# Altium PCB Dimmer.PcbDoc
Units mm, origin at the board's own origin, x right, y up, seen from the top; angles counter-clockwise.
Board outline 48 x 30 mm, 2 copper layers (Top Layer, Bottom Layer), stack 1.671 mm thick; 20 components, 12 nets, 70 pads, 42 vias.
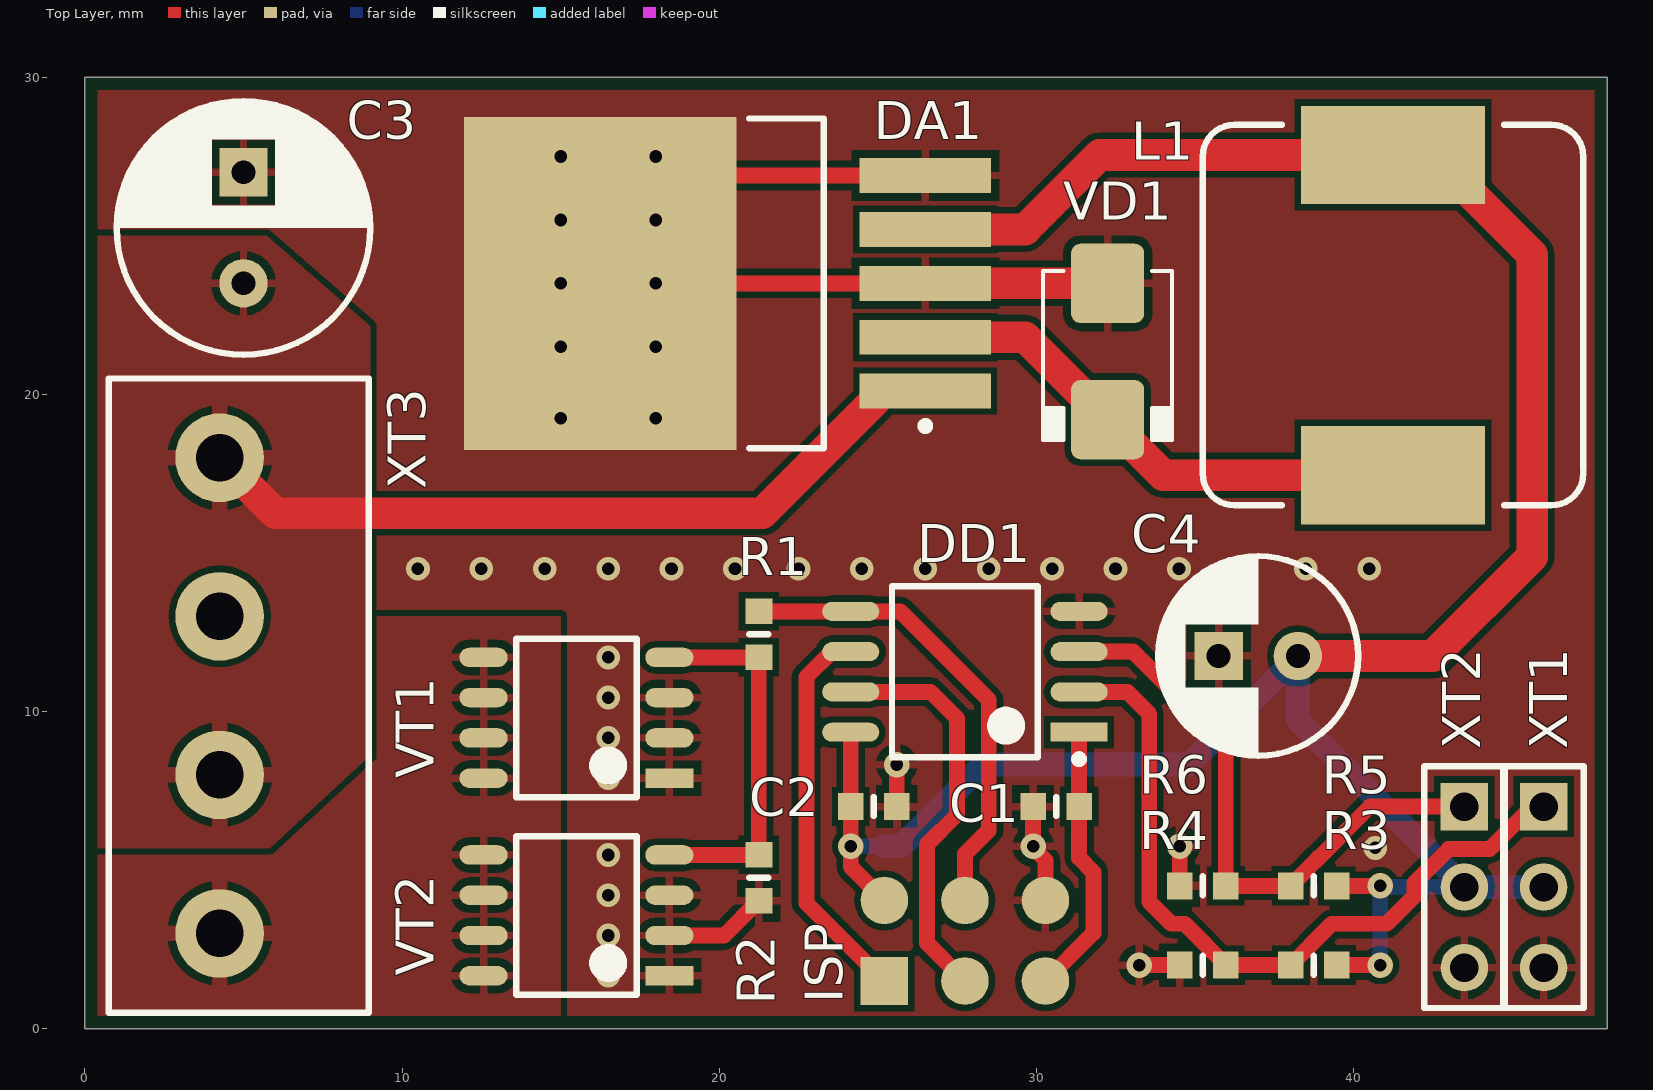
[diagram p0: Top Layer view]
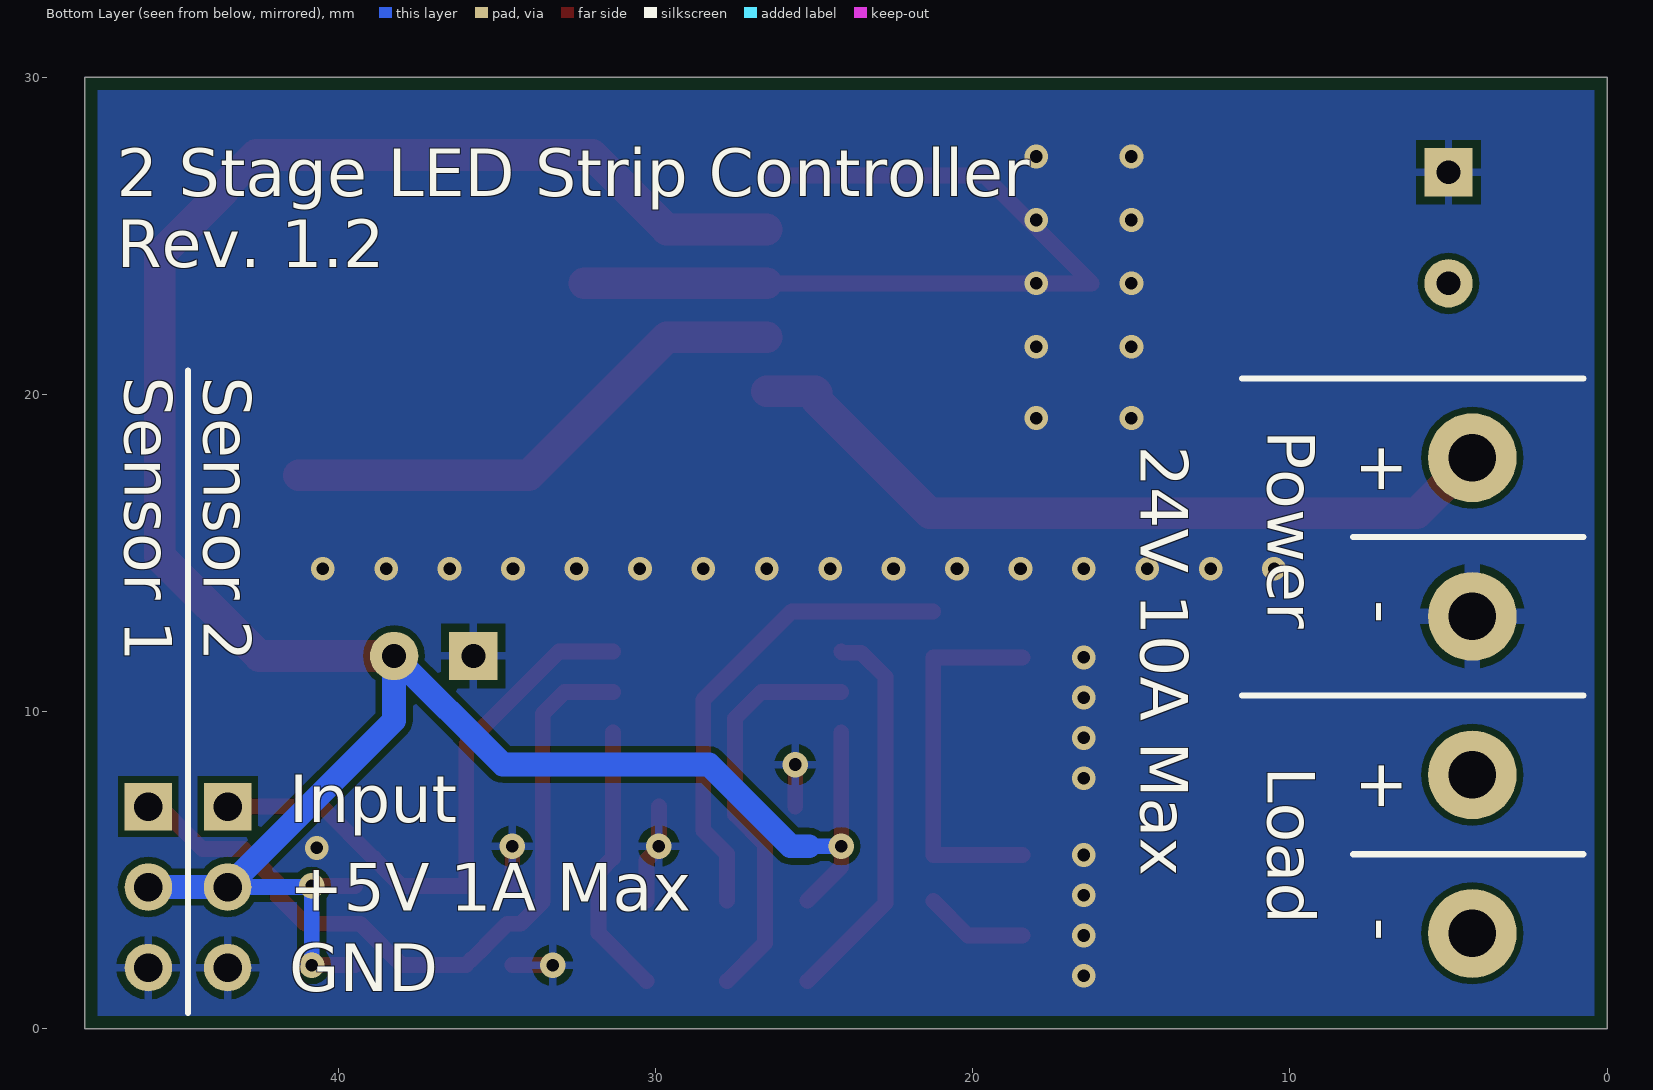
[diagram p1: Bottom Layer view, seen from below]

## Layer stack, top to bottom
Top Solder: solder mask 0.0102, Solder Resist, Dk 3.5
Top Layer: signal copper 0.0356
Dielectric 1: dielectric 1.6, FR-4, Dk 4.8
Bottom Layer: signal copper 0.0356
Bottom Solder: solder mask 0.0102, Solder Resist, Dk 3.5

## Board outline
0,0 0,30 48,30 48,0

## Design rules (kind name [scope] priority, off if disabled: settings)
AssemblyTestPointUsage [All] p1: valid=2
AssemblyTestpoint [All] p1: testpointundercomponent=FALSE minsize=0.2 maxsize=2.5 preferedsize=1.5 minholesize=0 maxholesize=1 preferedholesize=0.75 testpointgrid=0.05 usegrid=TRUE gridtolerance=0 allowsidetop=TRUE allowsidebottom=TRUE
BoardOutlineClearance [All] p1: gap=0.4 ignorepadtopadclearanceinfootprint=FALSE
Clearance [All] p1: gap=0.2 ignorepadtopadclearanceinfootprint=FALSE except(0.25: Arc-Hole Track-Hole SMDPad-Hole THPad-Hole Via-Hole Fill-Hole Poly-Hole Region-Hole Text-Hole)
ComponentClearance [All] p1: gap=0.25 collisioncheckmode=3 verticalgap=0.25 showdistances=FALSE
DiffPairsRouting [All] p1: maxlimit=0.5 minlimit=0.2 mostfreqgap=0.25 toplayer_minwidth=0.2 toplayer_maxwidth=0.5 toplayer_prefwidth=0.25 bottomlayer_minwidth=0.2 bottomlayer_maxwidth=0.5 bottomlayer_prefwidth=0.25 maxuncoupledlength=12.5
FabricationTestPointUsage [All] p1: valid=2 allowmultiple=FALSE
FabricationTestpoint [All] p1: side=3 testpointundercomponent=TRUE minsize=0.2 maxsize=2.5 preferedsize=1.5 minholesize=0 maxholesize=1 preferedholesize=0.75 testpointgrid=0.05 allowsidetop=TRUE allowsidebottom=TRUE usegrid=TRUE gridtolerance=0
Height [All] p1: minheight=0 maxheight=25 prefheight=12.5
HoleSize [All] p1: absolutevalues=TRUE maxlimit=3 minlimit=0.3 maxpercent=80.000 minpercent=20.000
HoleToHoleClearance [All] p1: gap=0.2 allowstackedmicrovias=TRUE
MatchedLengths [All] p1: tolerance=25 checknetsindiffpair=TRUE checkdiffpairvsdiffpair=FALSE checkxsignals=FALSE checkothers=FALSE
MinimumAnnularRing MinimumAnnularRing_Pad [IsPad] p1: minimumring=0.2
MinimumAnnularRing MinimumAnnularRing_Via [IsVia] p2: minimumring=0.15
MinimumSolderMaskSliver [All] p1: minsoldermaskwidth=0.15
ParallelSegment [All] p1: limit=250 gap=0.25
PlaneClearance [All] p1: clearance=0.5
PlaneConnect [All] p1: planeconnectstyle=Relief reliefexpansion=0.5 reliefentries=4 reliefconductorwidth=0.25 reliefairgap=0.25
PolygonConnect [All] p1: connectstyle=Relief reliefconductorwidth=0.25 reliefentries=4 polygonreliefangle="90 Angle" airgapwidth=0.25
RoomDefinition PWM [InComponentClass('PWM')] p1: confinementstyle=ConfineIn formatcopy=TRUE lockcomponents=FALSE outline 0,0 48,0 48,30 0,30
RoutingCorners [All] p1: cornerstyle=45-Degree minsetback=2.5 maxsetback=2.5
RoutingVias [All] p1: holewidth=0.4 width=0.8 viastyle="Through Hole" minholewidth=0.3 minwidth=0.6 maxholewidth=0.5 maxwidth=1.25
SMDEntry [All] p1: side=TRUE corner=TRUE anyangle=TRUE
SMDToCorner [All] p1: distance=78740
SilkToSilkClearance [All] p1: silktosilkclearance=0.15
SilkToSolderMaskClearance [IsPad] p1: minsilkscreentomaskgap=0.15 clearancetoexposedcopper=TRUE
SolderMaskExpansion TentedVias [IsVia] p1: expansion=0.102 istentingtop=TRUE
SolderMaskExpansion [All] p2: expansion=0.05 istentingtop=FALSE
StubLength [All] p1: limit=25
UnConnectedPin [All] p1:
UnRoutedNet [All] p1: checkbadconnections=TRUE
ViasUnderSMD [All] p1: allowed=FALSE
Width [All] p1: maxlimit=5 minlimit=0.2 preferedwidth=0.25
14 further rules are at their usual default settings.

## Components (designator, comment, footprint, x,y, rotation, side; value= is the part's Value field where it differs from the comment)
C1 "100n" CC0603 30.625,7 r0 top
C2 "100n" CC0603 24.875,7 r180 top
C3 "470u" "CE 8x16-3.5" 5,25.25 r270 top
C4 "220u" "CE 6.3x12-2.5" 37,11.75 r0 top
DA1 "LM2596-5.0" TO-263-5 20.25,23.5 r180 top
DD1 "ATtiny13A-SU" SOIC-8-208 27.75,11.25 r180 top
ISP "AVR ISP" ISP-6 25.21,1.5 r0 top
L1 "100u" HA78D 41.25,22.5 r90 top
R1 "100" RL0603 21.25,12.43 r270 top
R2 "100k" RL0603 21.25,4.75 r90 top
R3 "47k" RL0603 38.75,2 r0 top
R4 "47k" RL0603 35.25,2 r0 top
R5 "47k" RL0603 38.75,4.5 r0 top
R6 "47k" RL0603 35.25,4.5 r0 top
VD1 "SS310" DO-214AA 32.25,21.35 r270 top
VT1 "IRF7831PbF" SOIC-8-150-SSSGDDDD 15.5,9.795 r180 top
VT2 "IRF7831PbF" SOIC-8-150-SSSGDDDD 15.5,3.565 r180 top
XT1 "Sensor 1" HDR1X3 46,7 r270 top
XT2 "Sensor 2" HDR1X3 43.5,7 r270 top
XT3 "DG-series 4" DG126-5.0-04P 4.25,10.5 r270 top

## Footprints (in the part's own frame and the unit in brackets; to place one, negate y for a bottom-side part, rotate by r counter-clockwise, add the part's x,y. Pads: shape width x height; smd on the part's side, far side on the other; paste and mask are expansions set on the pad)
CC0603 [mm] "Chip Capacitor, 2-Leads, Body 1,6x0,8mm, MLCC0603, IPC Medium Density"
  rect 0.8x0.85 smd: 1(-0.725,0) 2(0.725,0)
  silkscreen extent 0,-0.3 0,0.3, body extent -0.8,-0.4 0.8,0.4, height 0.8
"CE 6.3x12-2.5" [mm] "Radial Aluminum Electrolytic Capacitor 6.3x12mm"
  rect 1.524x1.524 hole 0.75: 1(-1.25,0)
  round 1.524 hole 0.75: 2(1.25,0)
  silkscreen extent -3.2,-3.2 3.15,3.2, body extent -3.15,-3.15 3.15,3.15, height 12.5
"CE 8x16-3.5" [mm] "Radial Aluminum Electrolytic Capacitor 8.0x16mm"
  rect 1.524x1.524 hole 0.75: 1(-1.75,0)
  round 1.524 hole 0.75: 2(1.75,0)
  silkscreen extent -4,-4 4,4, body extent -4,-4 4,4, height 16.5
DG126-5.0-04P [mm] "Terminal Block, 4 pin, 5.0mm Pitch"
  round 2.8 hole 1.5: 1(-7.5,0) 2(-2.5,0) 3(2.5,0) 4(7.5,0)
  silkscreen extent -10,-3.5 10,4.7, body extent -10.25,-3.3 10,4.5, height 10.7
DO-214AA [mm] "JEDEC DO214 variation AA. SMB"
  rrect25% 2.5x2.3 smd: A(-2.15,0) C(2.15,0)
  silkscreen extent -2.54,-2.03 2.79,2.03, body extent -2.75,-1.95 2.75,1.95, height 2.45
HA78D [mm] "Wire Wound Inductor, 2-Leads, Body 12.0x12.0x7.0mm"
  rect 3.1x5.8 smd: 1(-5.05,0) 2(5.05,0)
  silkscreen extent -6,-6 6,6, body extent -6,-6 6,6, height 8
HDR1X3 [mm] "Connector; Header; 3 Position"
  rect 1.5x1.5 hole 0.9: 1(0,0)
  round 1.5 hole 0.9: 2(2.54,0) 3(5.08,0)
  silkscreen extent -1.27,-1.27 6.35,1.27, body extent -1.17,-1.25 6.45,1.25, height 8.6
ISP-6 [mm] "Atmel AVR In-System Programming Connector 6-pin"
  rect 1.5x1.5 smd: 1(0,0)
  round 1.5 smd: 2(0,2.54) 3(2.54,0) 4(2.54,2.54) 5(5.08,0) 6(5.08,2.54)
RL0603 [mm] "Chip Resistor, 2-Leads, Body 1,6x0,8mm, IPC Medium Density"
  rect 0.8x0.85 smd: 1(-0.725,0) 2(0.725,0)
  silkscreen extent 0,-0.3 0,0.3, body extent -0.8,-0.4 0.8,0.4, height 0.53
SOIC-8-150-SSSGDDDD [mm] "8-lead Small Outline Package (SOIC), 1.27mm pitch, medium 150mil body"
  oval 1.52x0.61 smd: D(2.93,1.9) D(2.93,-0.64) D(2.93,0.63) D(2.93,-1.91) G(-2.93,-1.91) S(-2.93,-0.64) S(-2.93,0.63)
  rect 1.52x0.61 smd: S(-2.93,1.9)
  silkscreen extent -1.9,-2.5 1.9,2.5, body extent -3.1,-2.5 3.1,2.5, height 1.75
SOIC-8-208 [mm] "SOIC, 8-Leads, Body 5,24x5,29mm, Pitch 1,27mm, 208mil body width"
  rect 1.8x0.6 smd: 1(-3.6,1.905)
  oval 1.8x0.6 smd: 2(-3.6,0.635) 3(-3.6,-0.635) 4(-3.6,-1.905) 5(3.6,-1.905) 6(3.6,-0.635) 7(3.6,0.635) 8(3.6,1.905)
  silkscreen extent -3.73,-2.7 2.3,2.88, body extent -4.05,-2.73 4.05,2.73, height 1.75
TO-263-5 [mm] "D2-PAK, 6-Pads, Body 7,93x8,56mm (max), IPC Medium Density"
  rect 4.15x1.1 smd: 1(-6.25,3.4) 2(-6.25,1.7) 3(-6.25,0) 4(-6.25,-1.7) 5(-6.25,-3.4)
  rect 8.6x10.5 smd: 3(4,0)
  silkscreen extent -6.38,-5.2 -0.7,5.2, body extent -7.99,-5 7.68,5, height 4.88

## Part data
C1 C2: library part "Ceramic Capacitor", "Ceramic Capacitor", Umax=16В
C3 C4: library part "Electrolythic Capacitor", "Polarized electrolythic capacitor"
  C3: Umax=25
  C4: Umax=16
DA1: "4.5V to 40V, 3A Low Component Count Step-Down Regulator", ComponentLink1Description=Datasheet, ComponentLink1URL=https://www.ti.com/lit/ds/symlink/lm2596.pdf, ComponentLink2Description="PCB Layout Guidelines", ComponentLink2URL=https://www.ti.com/lit/an/snva054c/snva054c.pdf, Imax=3, Umax=40
DD1: library part ATtiny13A, "8-bit AVR microcontroller", ComponentLink1Description=Datasheet, ComponentLink1URL=http://ww1.microchip.com/downloads/en/DeviceDoc/doc8126.pdf
L1: library part "Inductor non-conductive core", "Abstract inductor with non-conductive core"
R1 R2 R3 R4 R5 R6: library part "Resistor 1/16W", "Chip Resistor 1/16W"
VD1: "Rectifier Schottky diode", ComponentLink1Description=Datasheet, ComponentLink1URL=https://www.wontop.com/uploadfiles/56/sort_excel/pdf/ss32.pdf, Imax=3, Umax=100
VT1 VT2: "N-channel Power MOSFET", ComponentLink1Description=Datasheet, ComponentLink1URL=https://www.infineon.com/dgdl/irf7831pbf.pdf?fileId=5546d462533600a401535608fe711d10, Imax=17, Umax=30
XT1 XT2: library part "Header 3", "Header, 3-Pin"
XT3: "Terminal block"

## Via types
v1: diameter 0.75, hole 0.4, Top Layer to Bottom Layer, tented both sides, 35 vias
v2: diameter 0.8, hole 0.4, Top Layer to Bottom Layer, tented both sides, 7 vias

## Nets (pads, with @x,y where several pads share a name; then routed paths per layer and width w, separated by ;. In a path a pad name is that pad's centre, name@x,y a point inside that pad or via, vN(x,y) a via of type N, cw(c..) or ccw(c..) an arc to the next point about the centre after c; other vN are vias at no path point)
+5В: C2.2 C4.2 DA1.4 DD1.8 ISP.2 L1.2 R3.2 R5.2 XT1.2 XT2.2 | length 82
  Top Layer w0.5: DD1.8 C2.2 v2(24.15,5.75) 24.15,5.1 ISP.2 ; R3.2 v2(40.847,2) ; R5.2 v2(40.847,4.5) ; XT2.2@43.46,4.5 XT2.2
  Top Layer w1: DA1.4 29.65,25.2 32,27.55 L1.2 42.6,27.55 43.65,26.5 43.65,26.386 45.636,24.399 45.636,14.886 42.5,11.75 C4.2 C4.2@38.181,11.75
  Bottom Layer w0.5: v2(24.15,5.75) 25.165,5.75 ; v2(40.847,2) v2(40.847,4.5) 40.887,4.46 XT2.2
  Bottom Layer w0.75: 25.165,5.75 25.75,5.75 28.323,8.323 34.823,8.323 C4.2 38.25,9.71 XT2.2 XT1.2
+24В: C3.2 DA1.1 XT3.1 XT3.3 | length 24.7
  Top Layer w1: XT3.1 6,16.25 21.36,16.25 24.925,19.815 24.925,20.05 24.975,20.1 DA1.1
\RST: C1.2 DD1.1 ISP.5 | length 8.7
  Top Layer w0.5: ISP.5 31.802,3.012 31.802,4.931 31.35,5.382 DD1.1
CH_1: DD1.2 R3.1 R4.2 XT1.1 | length 24
  Top Layer w0.5: DD1.2 32.874,10.615 33.563,9.927 33.563,4.001 34.257,3.306 34.68,3.306 35.375,2.611 35.375,2.6 35.8,2.175 35.825,2.175 35.975,2.025 R4.2 R3.1 38.025,2.025 38.175,2.175 38.2,2.175 38.625,2.6 38.625,2.611 39.32,3.306 41.054,3.306 41.925,4.177 41.925,4.582 43.003,5.66 44.296,5.66 45.636,7 XT1.1
CH_2: DD1.3 R5.1 R6.2 XT2.1 | length 18.9
  Top Layer w0.5: DD1.3 33.054,11.885 35.975,8.964 R6.2 R5.1 38.625,5.1 38.625,5.111 38.889,5.375 38.9,5.375 40.525,7 XT2.1
GATE: R1.2 R2.2 VT1.G VT2.G | length 11.9
  Top Layer w0.5: VT2.G R2.2 R1.2 VT1.G
GND: C1.1 C2.1 C3.1 C4.1 DA1.3 DA1.5 DD1.4 ISP.6 R2.1 R4.1 R6.1 VD1.A VT1.S VT2.S XT1.3 XT2.3 XT3.2 | length 37.9
  Top Layer w0.5: VT2.S@18.43,2.935 20.16,2.935 R2.1 ; C2.1 v2(25.6,8.323) ; DA1.3@26.5,23.5 16.25,23.5 19.65,26.9 DA1.5 ; C1.1 v2(29.9,5.75) 29.9,5.697 30.29,5.307 ISP.6 ; v2(33.25,2) R4.1 ; R6.1 v2(34.525,5.75)
  Top Layer w1: DA1.3@26.5,23.5 VD1.A
  other v1: 16.5,1.665 16.5,2.936 16.5,4.205 16.5,5.475 40.69,5.697 16.5,7.895 16.5,9.165 16.5,10.435 16.5,11.705 10.5,14.5 12.5,14.5 14.5,14.5 16.5,14.5 18.5,14.5 20.5,14.5 22.5,14.5 24.5,14.5 26.5,14.5 28.5,14.5 30.5,14.5 32.5,14.5 34.5,14.5 36.5,14.5 38.5,14.5 40.5,14.5 15,19.25 18,19.25 15,21.5 18,21.5 15,23.5 18,23.5 15,25.5 18,25.5 15,27.5 18,27.5
MISO: DD1.6 ISP.1 | length 12.3
  Top Layer w0.5: DD1.6 24.117,11.852 23.517,11.852 22.75,11.085 22.75,3.96 ISP.1
PWM_DRV: DD1.5 ISP.4 R1.1 | length 15
  Top Layer w0.5: R1.1 25.71,13.155 28.5,10.365 28.5,6.25 27.75,5.5 ISP.4
PWM_OUT: VT1.D VT2.D XT3.4
PWR_SW: DA1.2 L1.1 VD1.C | length 16.6
  Top Layer w1: DA1.2 29.65,21.8 VD1.C 34,17.45 L1.1
SCK: DD1.7 ISP.3 | length 12.9
  Top Layer w0.5: DD1.7 26.667,10.615 27.5,9.782 27.5,6.75 26.55,5.8 26.55,2.7 ISP.3

## Polygon pours and split planes (outlines as drawn)
GND on Top Layer "Bottom Layer-GND" (solid, pour order 37): 0,30 0,0 48,0 48,30
PWM_OUT on Top Layer "Top Layer-PWM_OUT" (solid, pour order 6): 5.908,5.475 0,5.475 0,0 15,0 15,13 9.204,13 9.204,8.529
+24В on Top Layer "Top Layer-+24В" (solid, pour order 29): 0,5.5 6.05,5.5 9,8.182 9,22.143 5.728,25 0,25
GND on Bottom Layer "Bottom Layer-GND" (solid, pour order 40): 0,30 0,0 48,0 48,30

## Silkscreen, mask and mechanical layers (free items; w line width, h text height)
Bottom Overlay:
  lines w0.2: 0.75,5.5 8,5.5 ; 0.75,10.5 11.5,10.5 ; 0.75,15.5 8,15.5 ; 0.75,20.5 11.5,20.5 ; 44.75,0.5 44.75,20.75
  text "2 Stage LED Strip Controller / Rev. 1.2" at 47,24 h1.5
  text "Sensor 2" at 44.25,20.55 h1.5 r90
  text "Sensor 1" at 46.75,20.55 h1.5 r90
  text "Power" at 10.7,18.874 h1.5 r90
  text "+" at 7.75,18.5 h1.5 r90
  text "24V 10A Max" at 14.7,18.372 h1.5 r90
  text "-" at 7.75,13.5 h1.5 r90
  text "+" at 7.75,8.5 h1.5 r90
  text "Load" at 10.7,8.249 h1.5 r90
  text "Input" at 41.55,6.5 h1.5
  text "+5V 1A Max" at 41.55,3.71 h1.5
  text "-" at 7.75,3.5 h1.5 r90
  text "GND" at 41.55,1.17 h1.5
Board Shape:
  the board outline again, w0.1
Assembly Top:
  lines w0.1: 9.098,17.048 9.146,17

## Dimensions
48,30 to 48,0 on Mechanical 16
0,30 to 48,30 on Mechanical 16